# Altium PCB Adapter_board.PcbDoc
Units mm, origin at the board's own origin, x right, y up, seen from the top; angles counter-clockwise.
Board outline 50 x 50 mm, 2 copper layers (Top Layer, Bottom Layer); 6 components, 8 nets, 86 pads, 0 vias.
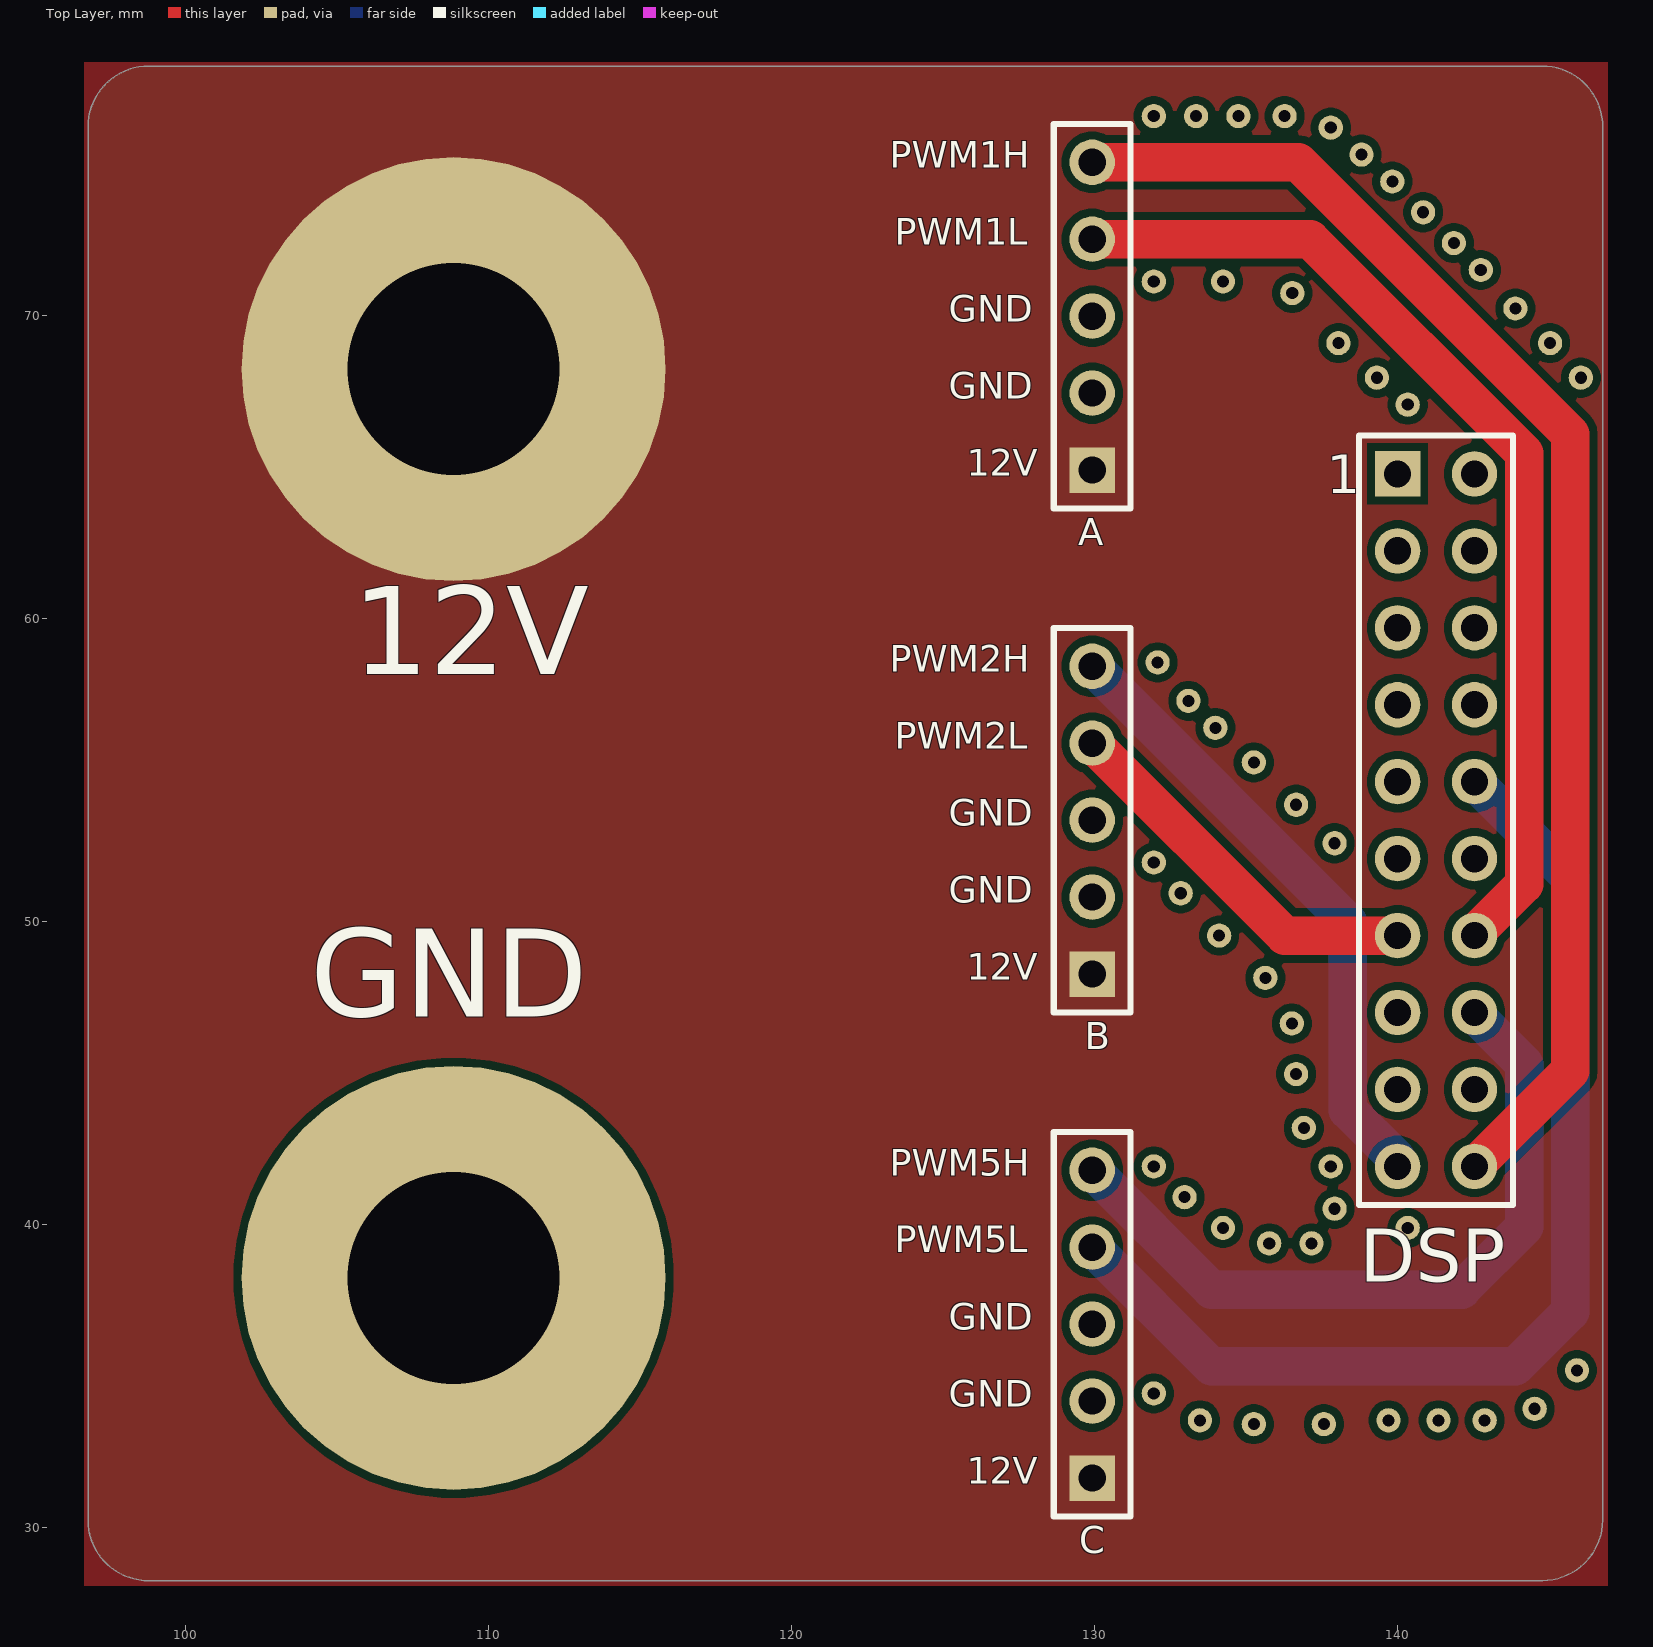
[diagram p0: Top Layer view]
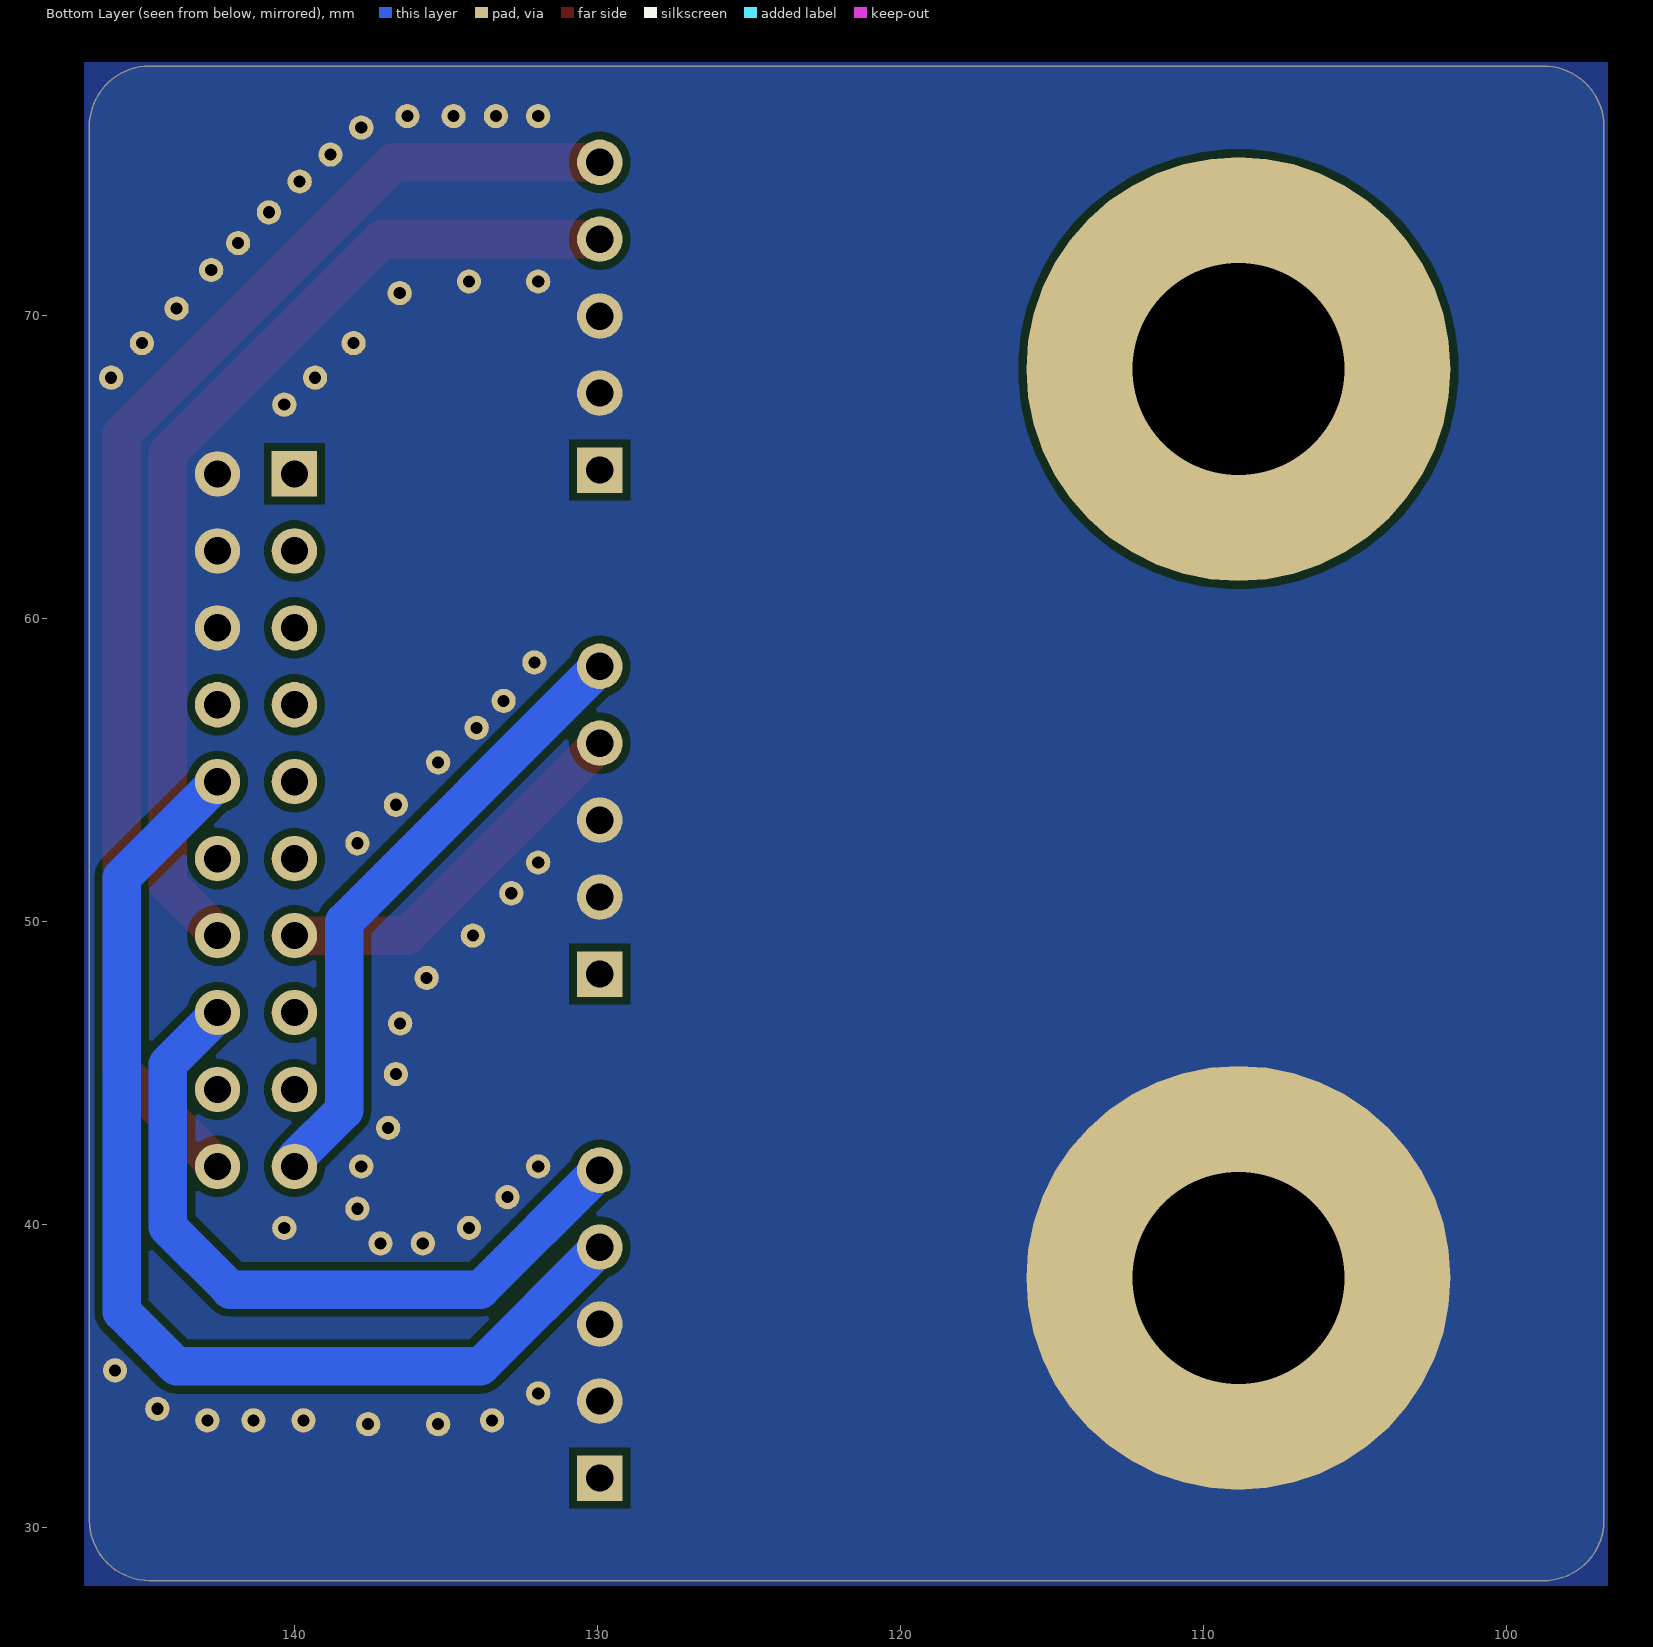
[diagram p1: Bottom Layer view, seen from below]

## Layer stack, top to bottom
Top Solder: solder mask 0.0102, Solder Resist, Dk 3.5
Top Layer: signal copper 0.0356
Dielectric 1: dielectric 0.32, FR-4, Dk 4.8
Bottom Layer: signal copper 0.0356
Bottom Solder: solder mask 0.0102, Solder Resist, Dk 3.5

## Board outline
96.774,30.226 96.774,76.327 96.774,76.232 cw(c98.774,76.232) 98.774,78.232 98.679,78.232 144.78,78.232 144.774,78.232 cw(c144.774,76.232) 146.774,76.232 146.774,76.238 146.774,30.232 cw(c144.755,30.251) 144.774,28.232 98.768,28.232 98.774,28.232 cw(c98.774,30.232)

## Design rules (kind name [scope] priority, off if disabled: settings)
Clearance [All] p1: gap=0.254 ignorepadtopadclearanceinfootprint=FALSE except(0: Arc-Hole Track-Hole SMDPad-Hole THPad-Hole Via-Hole Fill-Hole Poly-Hole Region-Hole Text-Hole)
HoleSize [All] p1: absolutevalues=TRUE maxlimit=7 minlimit=0.025 maxpercent=80.000 minpercent=20.000
PlaneClearance [All] p1: clearance=0.178
PlaneConnect [All] p1: planeconnectstyle=Direct reliefexpansion=0.508 reliefentries=4 reliefconductorwidth=0.254 reliefairgap=0.254
PolygonConnect [All] p1: connectstyle=Direct reliefconductorwidth=0.254 reliefentries=4 polygonreliefangle="90 Angle" airgapwidth=0.254
RoutingVias [All] p1: holewidth=0.711 width=1.27 viastyle="Through Hole" minholewidth=0.4 minwidth=0.8 maxholewidth=8 maxwidth=14
SolderMaskExpansion [All] p1: expansion=0.102 istentingtop=FALSE
Width [All] p1: maxlimit=1.524 minlimit=0.508 preferedwidth=1.016 minimp=50.000000 maximp=50.000000 favimp=50.000000
27 further rules are at their usual default settings.

## Components (designator, comment, footprint, x,y, rotation, side; value= is the part's Value field where it differs from the comment)
12V "12V" HOLE#1 108.839,70.866 r0 top (schematic designator H1)
A "Phase_A" HDR1X5 129.921,64.897 r90 top (schematic designator P1)
B "Phase_B" HDR1X5 129.921,48.26 r90 top (schematic designator P3)
C "Phase_C" HDR1X5 129.921,31.623 r90 top (schematic designator P4)
DSP "DSP" HDR2X10 140,64.77 r270 top (schematic designator P2)
GND "GND" HOLE#2 108.839,35.433 r0 top (schematic designator H2)

## Footprints (in the part's own frame and the unit in brackets; to place one, negate y for a bottom-side part, rotate by r counter-clockwise, add the part's x,y. Pads: shape width x height; smd on the part's side, far side on the other; paste and mask are expansions set on the pad)
HDR1X5 [mm] "Connector; Header; 5 Position"
  rect 1.5x1.5 hole 0.9: 1(0,0)
  round 1.5 hole 0.9: 2(2.54,0) 3(5.08,0) 4(7.62,0) 5(10.16,0)
  silkscreen extent -1.27,-1.27 11.43,1.27
HDR2X10 [mm] "Connector; Header; 10x2 Position"
  rect 1.5x1.5 hole 0.9: 1(0,0)
  round 1.5 hole 0.9: 2(0,2.54) 3(2.54,0) 4(2.54,2.54) 5(5.08,0) 6(5.08,2.54) 7(7.62,0) 8(7.62,2.54) 9(10.16,0) 10(10.16,2.54) 11(12.7,0) 12(12.7,2.54) 13(15.24,0) 14(15.24,2.54) 15(17.78,0) 16(17.78,2.54) 17(20.32,0) 18(20.32,2.54) 19(22.86,0) 20(22.86,2.54)
  silkscreen extent -1.27,-1.27 24.13,3.81
HOLE#1 [mm]
  round 14 hole 7: 1(0,-2.634)
HOLE#2 [mm]
  round 14 hole 7: 1(0,2.799)

## Part data
12V GND: library part HOLE
A B C: library part "Header 5", "Header, 5-Pin", LatestRevisionDate=17-Jul-2002, LatestRevisionNote="Re-released for DXP Platform.", Publisher="Altium Limited"
DSP: library part "Header 10X2", "Header, 10-Pin, Dual row", LatestRevisionDate=17-Jul-2002, LatestRevisionNote="Re-released for DXP Platform.", Publisher="Altium Limited"

## Free pads (board coordinates)
  round 0.8 hole 0.4: 1(131.953,76.581) 47(133.35,76.581) 48(134.747,76.581) 49(136.271,76.581) 50(137.795,76.2) 51(138.811,75.311) 52(139.827,74.422) 53(140.843,73.406) 54(141.859,72.39) 55(142.748,71.501) 56(143.891,70.231) 57(145.034,69.088) 59(146.05,67.945) 60(131.953,71.12) 62(134.239,71.12) 64(136.525,70.739) 65(138.049,69.088) 67(139.319,67.945) 68(140.335,67.056) 69(132.08,58.547) 70(133.096,57.277) 71(133.985,56.388) 72(135.255,55.245) 73(136.652,53.848) 75(137.922,52.578) 77(131.953,51.943) 79(132.842,50.927) 81(134.112,49.53) 83(135.636,48.133) 84(136.51,46.63) 85(136.652,44.958) 86(136.906,43.18) 87(137.795,41.91) 88(137.922,40.513) 90(140.335,39.878) 92(137.16,39.37) 93(135.763,39.37) 94(134.239,39.878) 95(132.969,40.894) 96(131.953,41.91) 98(131.953,34.417) 99(133.477,33.528) 100(135.255,33.401) 102(137.567,33.403) 103(139.7,33.528) 104(141.351,33.528) 105(142.875,33.528) 107(144.526,33.909) 108(145.923,35.179)

## Nets (pads, with @x,y where several pads share a name; then routed paths per layer and width w, separated by ;. In a path a pad name is that pad's centre, name@x,y a point inside that pad or via, vN(x,y) a via of type N, cw(c..) or ccw(c..) an arc to the next point about the centre after c; other vN are vias at no path point)
12V: 12V.1 A.1 B.1 C.1
GND: A.2 A.3 B.2 B.3 C.2 C.3 DSP.2 DSP.4 DSP.6 GND.1 pad.1 pad.47 pad.48 pad.49 pad.50 pad.51 pad.52 pad.53 pad.54 pad.55 pad.56 pad.57 pad.59 pad.60 pad.62 pad.64 pad.65 pad.67 pad.68 pad.69 pad.70 pad.71 pad.72 pad.73 pad.75 pad.77 pad.79 pad.81 pad.83 pad.84 pad.85 pad.86 pad.87 pad.88 pad.90 pad.92 pad.93 pad.94 pad.95 pad.96 pad.98 pad.99 pad.100 pad.102 pad.103 pad.104 pad.105 pad.107 pad.108
PWMA_H: A.5 DSP.20 | length 45
  Top Layer w1.27: A.5 136.726,75.057 145.703,66.08 145.703,45.073 DSP.20
PWMA_L: A.4 DSP.14 | length 33.8
  Top Layer w1.27: A.4 137.111,72.517 144.179,65.449 144.179,51.231 142.54,49.592 DSP.14
PWMB_H: B.5 DSP.19 | length 20.7
  Bottom Layer w1.27: B.5 138.361,49.98 138.361,43.771 139.956,42.176 139.956,41.954 DSP.19
PWMB_L: B.4 DSP.13 | length 12.7
  Top Layer w1.27: B.4 136.271,49.53 DSP.13
PWMC_H: C.5 DSP.16 | length 24.5
  Bottom Layer w1.27: C.5 133.858,37.846 142.113,37.846 144.179,39.912 144.179,45.289 142.54,46.928 DSP.16
PWMC_L: C.4 DSP.10 | length 37
  Bottom Layer w1.27: C.4 133.858,35.306 143.891,35.306 145.703,37.118 145.703,51.447 DSP.10
pads on no net: DSP.1 DSP.3 DSP.5 DSP.7 DSP.8 DSP.9 DSP.11 DSP.12 DSP.15 DSP.17 DSP.18

## Polygon pours and split planes (outlines as drawn)
GND on Bottom Layer "GND" (solid, pour order 1): 96.647,78.359 146.939,78.359 146.939,28.067 96.647,28.067
12V on Top Layer "12V" (solid, pour order 0): 96.647,78.359 146.939,78.359 146.939,28.067 96.647,28.067

## Silkscreen, mask and mechanical layers (free items; w line width, h text height)
Top Overlay:
  text "PWM1H" at 123.236,74.575 h1.5
  text "PWM1L" at 123.396,72.035 h1.5
  text "GND" at 125.179,69.497 h1.5
  text "GND" at 125.179,66.957 h1.5
  text "12V" at 125.786,64.415 h1.5
  text "PWM2H" at 123.236,57.938 h1.5
  text "PWM2L" at 123.396,55.398 h1.5
  text "GND" at 125.179,52.86 h1.5
  text "GND" at 125.179,50.32 h1.5
  text "12V" at 125.786,47.778 h1.5
  text "PWM5H" at 123.236,41.311 h1.5
  text "PWM5L" at 123.396,38.771 h1.5
  text "GND" at 125.179,36.223 h1.5
  text "GND" at 125.179,33.683 h1.5
  text "12V" at 125.786,31.141 h1.5
Mechanical 1:
  lines w0.254: 96.774,30.226 96.774,76.327 ; 96.774,30.232 ccw(c98.774,30.232) 98.774,28.232 ; 96.774,76.232 cw(c98.774,76.232) 98.774,78.232 ; 98.679,78.232 144.78,78.232 ; 98.768,28.232 144.818,28.232 ; 144.774,28.232 ccw(c144.755,30.251) 146.774,30.232 ; 144.774,78.232 cw(c144.774,76.232) 146.774,76.232 ; 146.774,30.188 146.774,76.238

## Text inside footprints (layer, text, board x,y; h text height)
DSP: Top Overlay "1" at 137.668,64.135 h1.27